# EAGLE board DA_uno_shield_0_4 (EAGLE 7.5.0)
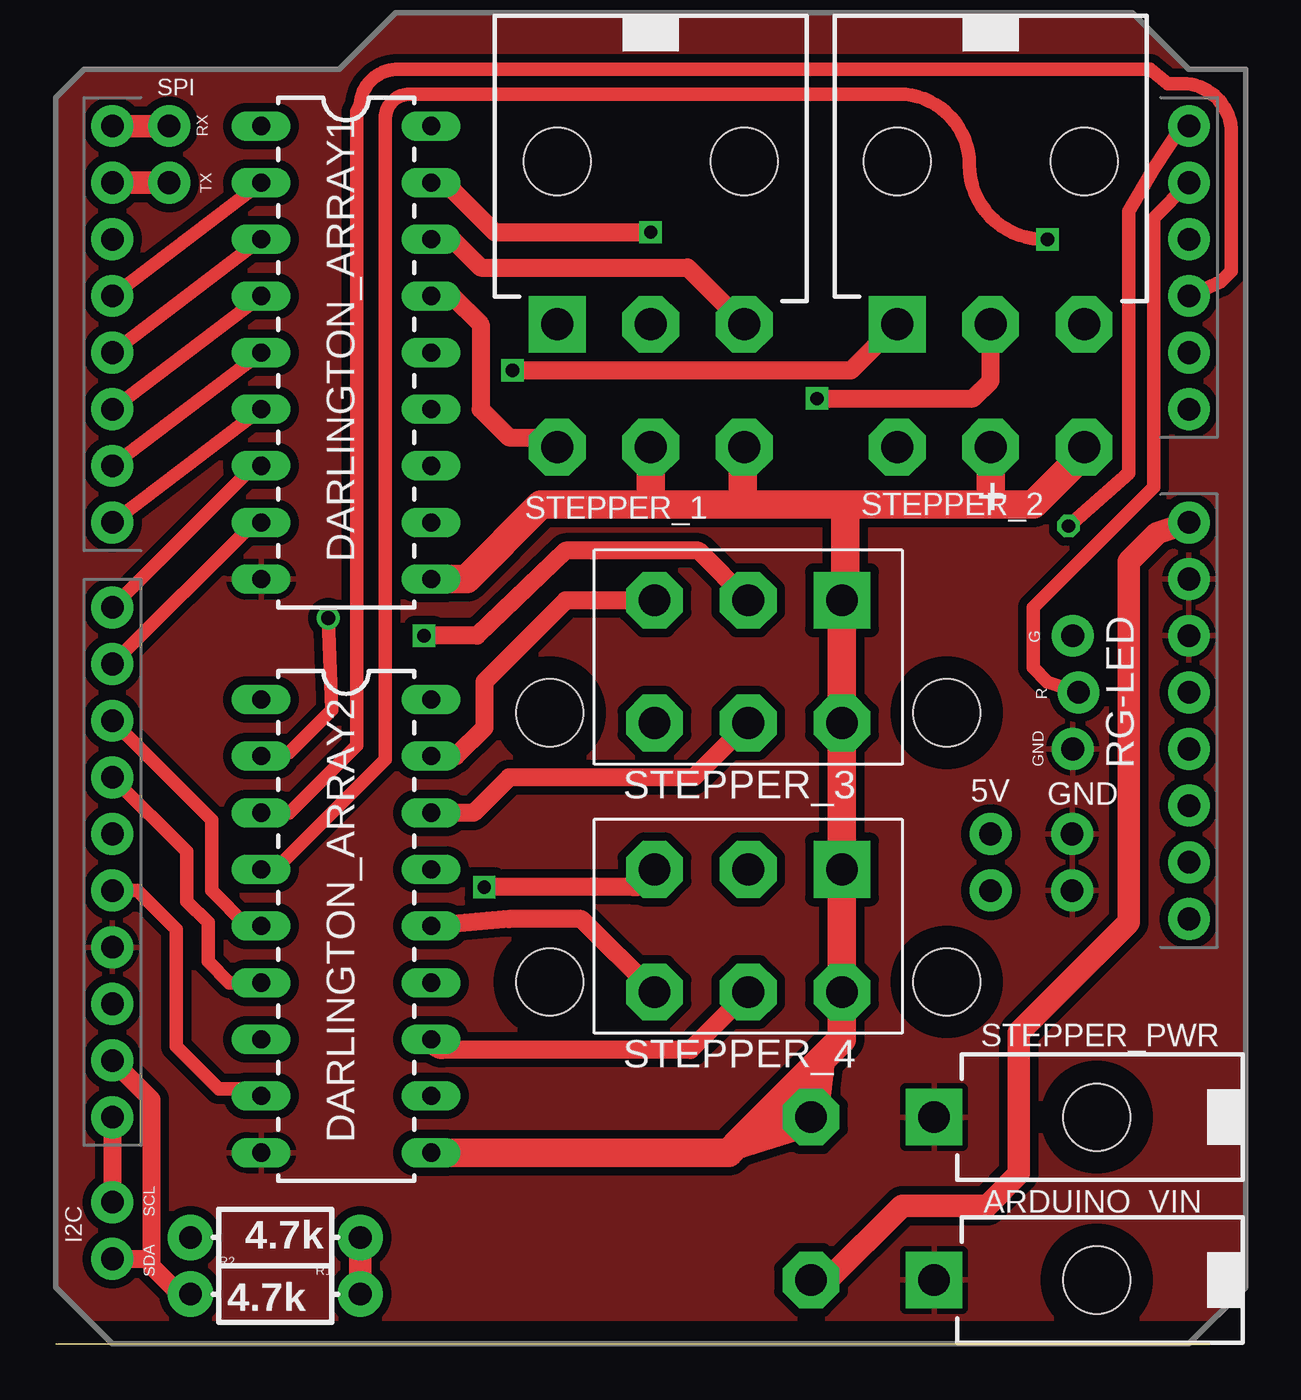
[diagram p0: board, top side]
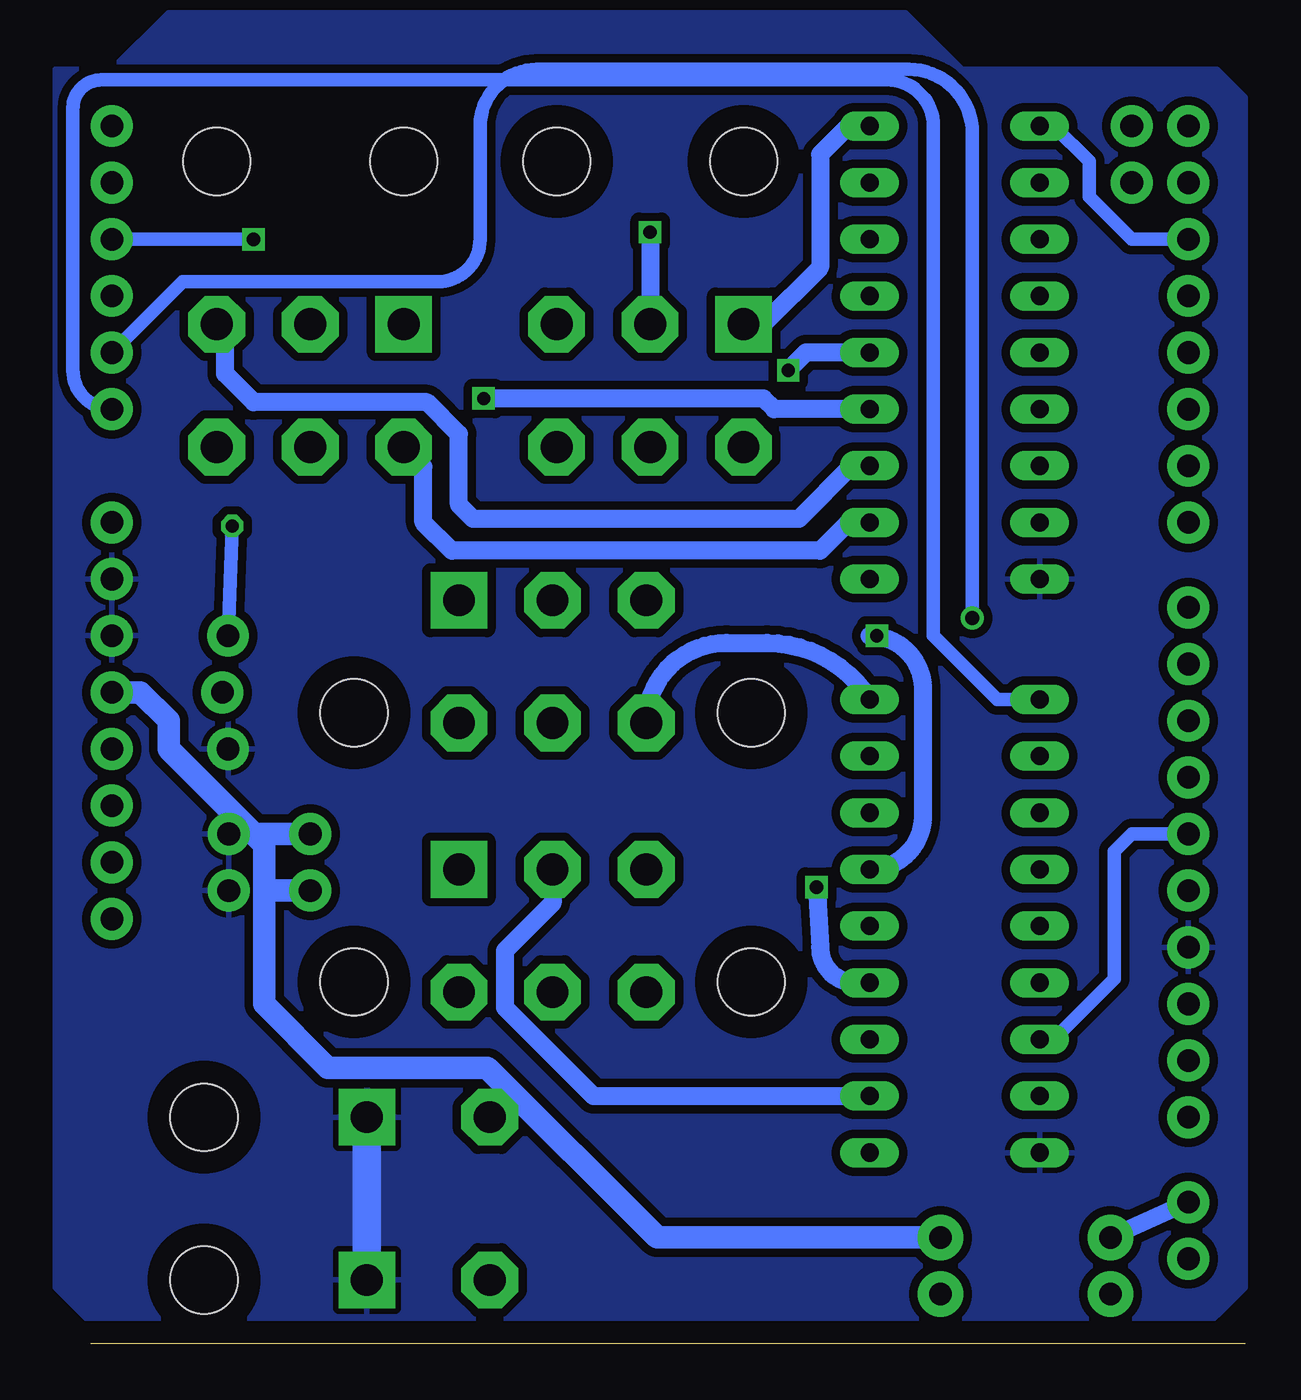
[diagram p1: board, bottom side, seen from below]

Size 51.74 x 0 mm. Coordinates in mm from the lower left corner, seen from the top.
Outline: 0,0 51.74,0
Copper layers (1*16): Top 0.035mm / dielectric 1.5mm / Bottom 0.035mm
Design rules "default": minimum track width 10mil, minimum drill 24mil, track to track 8mil, track to pad 8mil, pad to pad 8mil, via to via 8mil, smd to smd 8mil, copper to edge 40mil, drill to drill 8mil, minimum pad ring 10mil, minimum via ring 8mil, stop-mask expansion 4mil, vias tented up to drill 0mil, thermal gap 10mil
Net classes: 0 default: width 0.813 mm, drill 0.381 mm, clearance 0.381 mm; 1 GND: width 0.508 mm, drill 0.508 mm, clearance 0.381 mm

## Footprints (pad centres in the part's own frame; a part is rotated, then mirrored left to right if it is on the bottom)
1X02_NO_SILK = drill 1.016 pad 1.88: 1 0,0; 2 2.54,0
UNO_R3_SHIELD = drill 1.016 pad 1.88: 3.3V 50.8,26.67; 5V 50.8,29.21; A0 50.8,41.91; A1 50.8,44.45; A2 50.8,46.99; A3 50.8,49.53; A4 50.8,52.07; A5 50.8,54.61; AREF 2.54,15.24; D2 2.54,49.53; D3 2.54,46.99; D4 2.54,44.45; D5 2.54,41.91; D6 2.54,39.37; D7 2.54,36.83; D8 2.54,33.02; D9 2.54,30.48; D10 2.54,27.94; D11 2.54,25.4; D12 2.54,22.86; D13 2.54,20.32; GND@0 50.8,31.75; GND@1 50.8,34.29; GND@2 2.54,17.78; IOREF 50.8,21.59; NC 50.8,19.05; RES 50.8,24.13; RX 2.54,54.61; SCL 2.54,10.16; SDA 2.54,12.7; TX 2.54,52.07; VIN 50.8,36.83
39-30-?02? = drill 1.422 pad 2.54 square: 1 0,0 | drill 1.422 pad 2.54 octagon: 2 0,5.512 | hole 3: 0,-7.3
DIL18 = drill 0.813 long: 1 -10.16,-3.81; 2 -7.62,-3.81; 3 -5.08,-3.81; 4 -2.54,-3.81; 5 0,-3.81; 6 2.54,-3.81; 7 5.08,-3.81; 8 7.62,-3.81; 9 10.16,-3.81; 10 10.16,3.81; 11 7.62,3.81; 12 5.08,3.81; 13 2.54,3.81; 14 0,3.81; 15 -2.54,3.81; 16 -5.08,3.81; 17 -7.62,3.81; 18 -10.16,3.81
AXIAL-0.3-KIT = drill 1.016 pad 2.032: P$1 -3.81,0; P$2 3.81,0
1X03_LOCK_NO_SILK = drill 1.016 pad 1.88: 1 0,0.127; 2 2.54,-0.127; 3 5.08,0.127
39-30-?06? = drill 1.422 pad 2.54 square: 1 4.191,0 | drill 1.422 pad 2.54 octagon: 2 0,0; 3 -4.191,0; 4 4.191,5.512; 5 0,5.512; 6 -4.191,5.512 | hole 3: -4.191,-7.3; 4.191,-7.3
39-29-?06? = drill 1.422 pad 2.54 square: P$1 0,0 | drill 1.422 pad 2.54 octagon: P$2 0,5.5; P$3 4.2,0; P$4 4.2,5.5; P$5 8.4,0; P$6 8.4,5.5 | hole 3: -4.7,5.04; 13.1,5.04

## Placement (x,y rotation side)
5V  [1X02_NO_SILK]  41.91,20.32 90 top  (outside the outline)
ARDUINO  ARDUINO_R3_SHIELD  [UNO_R3_SHIELD]  0,0 0 top  (outside the outline)
ARDUINO_VIN  39-30-02?_S  [39-30-?02?]  39.37,2.86 90 top
DARLINGTON_ARRAY1  [DIL18]  13.02,44.45 270 top  (outside the outline)
DARLINGTON_ARRAY2  [DIL18]  13.02,18.73 270 top  (outside the outline)
GND  [1X02_NO_SILK]  45.56,22.86 270 top  (outside the outline)
I2C  [1X02_NO_SILK]  2.54,3.81 90 top  (outside the outline)
R1  4.7k  [AXIAL-0.3-KIT]  9.84,4.76 180 top  (outside the outline)
R2  4.7k  [AXIAL-0.3-KIT]  9.84,2.22 0 top
RG-LED  [1X03_LOCK_NO_SILK]  45.72,26.67 90 top  (outside the outline)
SPI  [1X02_NO_SILK]  5.08,54.61 270 top  (outside the outline)
STEPPER_1  39-30-06?_S  [39-30-?06?]  26.67,45.72 180 top  (outside the outline)
STEPPER_2  39-30-06?_S  [39-30-?06?]  41.91,45.72 180 top  (outside the outline)
STEPPER_3  39-29-06?  [39-29-?06?]  35.24,33.34 180 top  (outside the outline)
STEPPER_4  39-29-06?  [39-29-?06?]  35.24,21.27 180 top  (outside the outline)
STEPPER_PWR  39-30-02?_S  [39-30-?02?]  39.37,10.16 90 top  (outside the outline)

## Library data of the parts
5V GND I2C RG-LED SPI = SparkFun-Connectors
ARDUINO = Nathans-Arduinos
ARDUINO_VIN STEPPER_1-STEPPER_4 STEPPER_PWR = MTIID-molex-mini-fit-with-some-vertical
DARLINGTON_ARRAY1 DARLINGTON_ARRAY2 = SparkFun-PowerIC
R1 R2 = SparkFun-Resistors

## Nets
5V: 5V.1 5V.2 ARDUINO.5V R1.P$1 R2.P$2
A0: ARDUINO.A0 DARLINGTON_ARRAY2.1
A1: ARDUINO.A1 DARLINGTON_ARRAY2.2
A2: ARDUINO.A2 DARLINGTON_ARRAY2.3
A3: ARDUINO.A3 DARLINGTON_ARRAY2.4
A4: ARDUINO.A4 RG-LED.2
A5: ARDUINO.A5 RG-LED.3
D10: ARDUINO.D10 DARLINGTON_ARRAY2.5
D11: ARDUINO.D11 DARLINGTON_ARRAY2.6
D12: ARDUINO.D12 DARLINGTON_ARRAY2.7
D13: ARDUINO.D13 DARLINGTON_ARRAY2.8
GND: ARDUINO.GND@0 ARDUINO.GND@1 ARDUINO.GND@2 ARDUINO_VIN.1 DARLINGTON_ARRAY1.9 DARLINGTON_ARRAY2.9 GND.1 GND.2 RG-LED.1 STEPPER_PWR.1
N$1: DARLINGTON_ARRAY1.14 STEPPER_2.1
N$2: DARLINGTON_ARRAY1.13 STEPPER_2.2
N$3: DARLINGTON_ARRAY1.12 STEPPER_2.3
N$4: DARLINGTON_ARRAY1.11 STEPPER_2.4
N$5: ARDUINO.D6 DARLINGTON_ARRAY1.5
N$6: ARDUINO.D7 DARLINGTON_ARRAY1.6
N$7: ARDUINO.D8 DARLINGTON_ARRAY1.7
N$8: ARDUINO.D9 DARLINGTON_ARRAY1.8
N$30: DARLINGTON_ARRAY2.18 STEPPER_3.P$6
N$33: ARDUINO.D2 DARLINGTON_ARRAY1.1
N$34: DARLINGTON_ARRAY1.18 STEPPER_1.1
N$35: DARLINGTON_ARRAY1.17 STEPPER_1.2
N$36: DARLINGTON_ARRAY1.16 STEPPER_1.3
N$37: DARLINGTON_ARRAY1.15 STEPPER_1.4
N$38: ARDUINO.D3 DARLINGTON_ARRAY1.2
N$39: ARDUINO.D4 DARLINGTON_ARRAY1.3
N$40: ARDUINO.D5 DARLINGTON_ARRAY1.4
N$41: DARLINGTON_ARRAY2.17 STEPPER_3.P$5
N$42: DARLINGTON_ARRAY2.16 STEPPER_3.P$4
N$43: DARLINGTON_ARRAY2.15 STEPPER_3.P$3
N$44: DARLINGTON_ARRAY2.14 STEPPER_4.P$6
N$45: DARLINGTON_ARRAY2.13 STEPPER_4.P$5
N$46: DARLINGTON_ARRAY2.12 STEPPER_4.P$4
N$47: DARLINGTON_ARRAY2.11 STEPPER_4.P$3
RX: ARDUINO.RX SPI.1
SCL: ARDUINO.SCL I2C.2 R1.P$2
SDA: ARDUINO.SDA I2C.1 R2.P$1
TX: ARDUINO.TX SPI.2
VCC: DARLINGTON_ARRAY1.10 DARLINGTON_ARRAY2.10 STEPPER_1.5 STEPPER_1.6 STEPPER_2.5 STEPPER_2.6 STEPPER_3.P$1 STEPPER_3.P$2 STEPPER_4.P$1 STEPPER_4.P$2 STEPPER_PWR.2
VIN: ARDUINO.VIN ARDUINO_VIN.2

## Tracks (layer width: path | path; a pad name or v marks a point on that pad's centre or on a via)
5V
  Top 1.016: R2.P$2 R1.P$1
  Bottom 1.016: R1.P$1 26.35,4.76 33.97,12.38 41.12,12.38 43.97,15.24 43.97,20.32 | 43.97,20.32 43.97,22.38 44.45,22.86 | 44.45,22.86 48.26,26.67 48.26,27.94 49.53,29.21 ARDUINO.5V | 5V.2 44.45,22.86 | 5V.1 43.97,20.32
A0
  Bottom 0.61: DARLINGTON_ARRAY2.1 11.11,28.89 13.97,31.75 13.97,54.61 arc-90 16.03,56.67 51.28,56.67 arc-90 52.55,55.4 52.55,43.66 arc-90 ARDUINO.A0
A1  (via drill 0.63)
  Top 0.61: DARLINGTON_ARRAY2.2 9.37,26.51 10.48,26.51 12.38,28.42 v12.22,32.54
  Bottom 0.61: v12.22,32.54 12.22,54.29 arc-90 15.08,57.15 31.75,57.15 arc-90 34.29,54.61 34.29,49.53 arc90 36.2,47.62 47.62,47.62 ARDUINO.A1
A2
  Top 0.61: DARLINGTON_ARRAY2.3 10.48,23.81 13.49,26.83 13.49,55.24 13.65,55.56 arc-90 15.4,57.15 49.05,57.15 49.85,56.52 50.48,56.52 arc-90 52.7,54.29 52.7,48.1 52.23,47.62 ARDUINO.A2
A3  (via drill 0.6)
  Top 0.61: DARLINGTON_ARRAY2.4 9.84,21.27 14.76,26.19 14.76,54.93 arc-90 15.88,56.04 37.78,56.04 arc-90 40.96,52.86 arc93 v44.45,49.53
  Bottom 0.61: v44.45,49.53 ARDUINO.A3
A4
  Top 0.61: ARDUINO.A4 49.21,50.48 49.21,38.42 43.81,33.02 43.81,30.32 44.45,29.69 RG-LED.2
A5  (via drill 0.6)
  Top 0.61: ARDUINO.A5 50.48,54.61 49.21,52.7 48.1,50.8 48.1,39.05 v45.4,36.67
  Bottom 0.61: v45.4,36.67 RG-LED.3
D10
  Top 0.61: ARDUINO.D10 6.99,23.5 6.99,20.32 8.57,18.73 DARLINGTON_ARRAY2.5
D11
  Top 0.61: ARDUINO.D11 5.87,22.07 5.87,19.84 6.83,18.89 6.83,17.14 7.78,16.19 DARLINGTON_ARRAY2.6
D12
  Bottom 0.61: ARDUINO.D12 5.08,22.86 5.87,22.07 5.87,16.35 8.41,13.81 9.05,13.81 DARLINGTON_ARRAY2.7
D13
  Top 0.61: ARDUINO.D13 3.65,20.32 5.4,18.57 5.4,13.34 7.3,11.43 8.89,11.43 DARLINGTON_ARRAY2.8
GND
  Bottom 1.27: STEPPER_PWR.1 ARDUINO_VIN.1
  pour Bottom: 15.24,59.69 12.7,57.15 1.27,57.15 0,55.88 0,2.54 2.54,0 50.8,0 53.34,2.54 53.34,57.15 50.8,57.15 48.26,59.69
  pour Top: 1.27,57.15 0,55.88 0,2.54 2.54,0 50.8,0 53.34,2.54 53.34,57.15 50.8,57.15 48.26,59.69 15.24,59.69 12.7,57.15
N$1  (via drill 0.6)
  Top 0.813: v20.48,43.66 35.66,43.66 STEPPER_2.1
  Bottom 0.813: DARLINGTON_ARRAY1.14 19.68,44.45 v20.48,43.66
N$2  (via drill 0.6)
  Top 0.813: v34.13,42.39 41.12,42.39 41.91,43.18 STEPPER_2.2
  Bottom 0.813: DARLINGTON_ARRAY1.13 21.11,41.91 21.59,42.39 v34.13,42.39
N$3
  Bottom 0.813: DARLINGTON_ARRAY1.12 17.62,39.37 20,36.99 34.61,36.99 35.24,37.62 35.24,40.8 36.67,42.23 44.45,42.23 45.72,43.5 45.72,45.34 STEPPER_2.3
N$4
  Bottom 0.813: DARLINGTON_ARRAY1.11 17.78,36.83 19.05,35.56 35.56,35.56 36.83,36.83 36.83,39.32 STEPPER_2.4
N$5
  Top 0.61: ARDUINO.D6 DARLINGTON_ARRAY1.5
N$6
  Top 0.61: ARDUINO.D7 DARLINGTON_ARRAY1.6
N$7
  Top 0.61: ARDUINO.D8 8.89,39.37 DARLINGTON_ARRAY1.7
N$8
  Top 0.61: ARDUINO.D9 8.89,36.83 DARLINGTON_ARRAY1.8
N$30
  Bottom 0.813: STEPPER_3.P$6 arc90 23.25,31.43 21.43,31.43 arc58 DARLINGTON_ARRAY2.18
N$33
  Bottom 0.61: ARDUINO.D2 5.08,49.53 6.99,51.44 6.99,53.02 8.57,54.61 DARLINGTON_ARRAY1.1
N$34
  Bottom 0.813: DARLINGTON_ARRAY1.18 17.78,54.61 19.05,53.34 19.05,48.26 21.59,45.72 STEPPER_1.1
N$35  (via drill 0.6)
  Top 0.813: DARLINGTON_ARRAY1.17 17.46,52.07 19.68,49.85 v26.67,49.85
  Bottom 0.813: v26.67,49.85 STEPPER_1.2
N$36
  Top 0.813: DARLINGTON_ARRAY1.16 17.78,49.53 19.05,48.26 28.32,48.26 STEPPER_1.3
N$37
  Top 0.813: DARLINGTON_ARRAY1.15 17.78,46.99 19.05,45.72 19.05,41.91 20.32,40.64 22.05,40.64 STEPPER_1.4
N$38
  Top 0.61: ARDUINO.D3 DARLINGTON_ARRAY1.2
N$39
  Top 0.61: ARDUINO.D4 DARLINGTON_ARRAY1.3
N$40
  Top 0.61: ARDUINO.D5 DARLINGTON_ARRAY1.4
N$41
  Top 0.813: STEPPER_3.P$5 22.86,33.34 19.21,29.69 19.21,27.62 17.94,26.35 DARLINGTON_ARRAY2.17
N$42
  Top 0.813: STEPPER_3.P$4 28.61,25.4 20.32,25.4 18.73,23.81 DARLINGTON_ARRAY2.16
N$43  (via drill 0.6)
  Top 0.813: STEPPER_3.P$3 28.82,35.56 22.86,35.56 18.89,31.75 v16.51,31.75
  Bottom 0.813: v16.51,31.75 16.83,31.75 arc90 14.45,29.37 14.45,23.65 arc90 DARLINGTON_ARRAY2.15
N$44
  Top 0.813: STEPPER_4.P$6 23.57,19.05 20.32,19.05 DARLINGTON_ARRAY2.14
N$45  (via drill 0.6)
  Top 0.813: STEPPER_4.P$5 arc-90 25.89,20.48 v19.21,20.48
  Bottom 0.813: v19.21,20.48 19.05,17.78 arc-90 17.46,16.19 DARLINGTON_ARRAY2.13
N$46
  Top 0.813: STEPPER_4.P$4 28.45,13.18 17.3,13.18 arc-90 DARLINGTON_ARRAY2.12
N$47
  Bottom 0.813: STEPPER_4.P$3 31.04,19.76 33.18,17.62 33.18,15.08 29.21,11.11 DARLINGTON_ARRAY2.11
RX
  Top 1.016: ARDUINO.RX SPI.1
SCL
  Top 0.813: ARDUINO.SCL I2C.2
  Bottom 0.813: I2C.2 R1.P$2
SDA
  Top 0.61: 5.56,2.22 R2.P$1
  Top 0.813: ARDUINO.SDA 4.29,10.95 4.29,3.81 | 4.29,3.81 4.29,3.49 5.56,2.22 | I2C.1 4.29,3.81
TX
  Top 1.016: ARDUINO.TX SPI.2
VCC
  Top 0.813: DARLINGTON_ARRAY1.10 17.78,34.29
  Top 1.27: DARLINGTON_ARRAY2.10 30.16,8.57 30.48,8.89 | 30.48,8.89 32.38,10.79 | 32.38,10.79 34.29,12.7 | 34.29,12.7 35.24,13.65 STEPPER_4.P$2 STEPPER_4.P$1 STEPPER_3.P$2 STEPPER_3.P$1 35.4,33.5 35.4,37.62 | STEPPER_PWR.2 32.43,10.79 32.38,10.79 | 35.4,37.62 30.8,37.62 | 30.8,37.62 26.67,37.62 | 26.67,37.62 21.75,37.62 18.41,34.29 DARLINGTON_ARRAY1.10 | STEPPER_1.5 26.67,37.62 | STEPPER_1.6 30.8,40.15 30.8,37.62 | 35.4,37.62 41.91,37.62 | 41.91,37.62 43.81,37.62 46.1,39.91 STEPPER_2.6 | STEPPER_2.5 41.91,37.62 | 34.29,12.7 33.97,10 30.48,8.89
  Top 1.422: STEPPER_1.6 31.07,40.21
VIN
  Top 1.016: ARDUINO.VIN 49.37,36.35 48.1,35.08 48.1,18.89 43.18,13.97 43.18,7.62 41.75,6.19 37.94,6.19 34.61,2.86 ARDUINO_VIN.2

## Text on the board
tNames: RX | TX | + | G | R | GND | SCL | SDA